# Altium PCB noura_jahani.PcbDoc
Units mm, origin at the board's own origin, x right, y up, seen from the top; angles counter-clockwise.
Board outline 101.35 x 63.02 mm, 2 copper layers (Top Layer, Bottom Layer); 28 components, 23 nets, 114 pads, 26 vias.
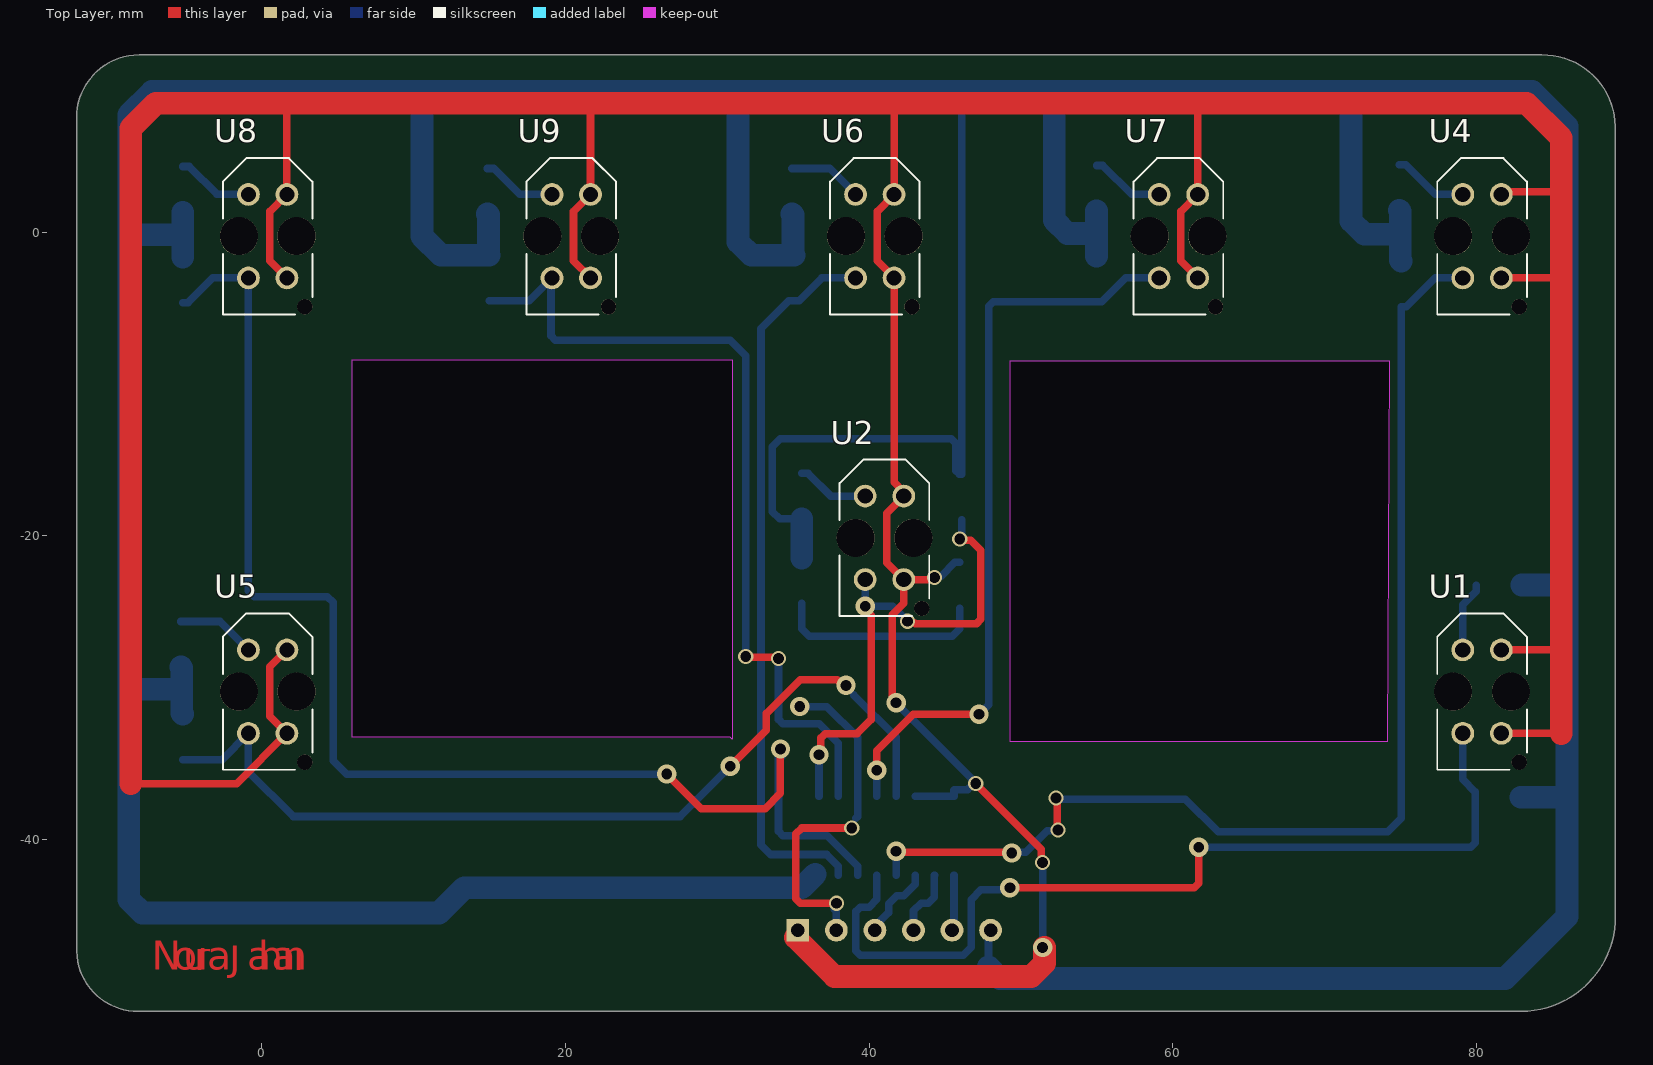
[diagram p0: Top Layer view]
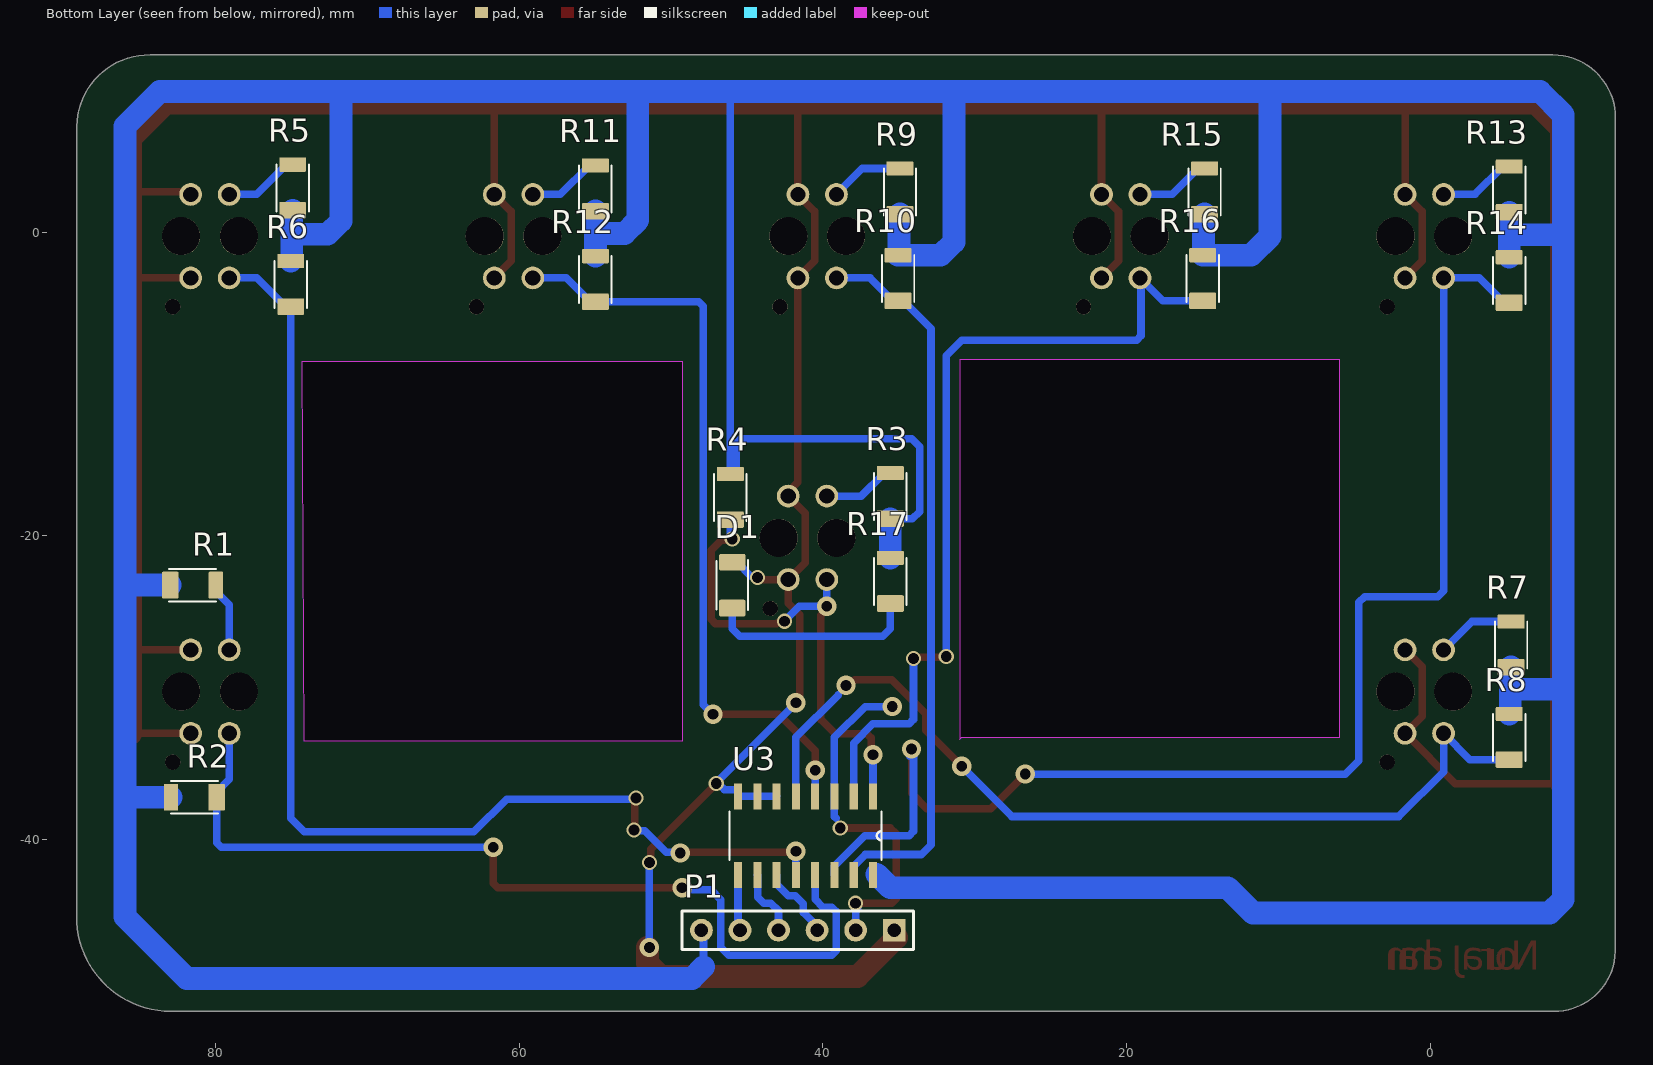
[diagram p1: Bottom Layer view, seen from below]
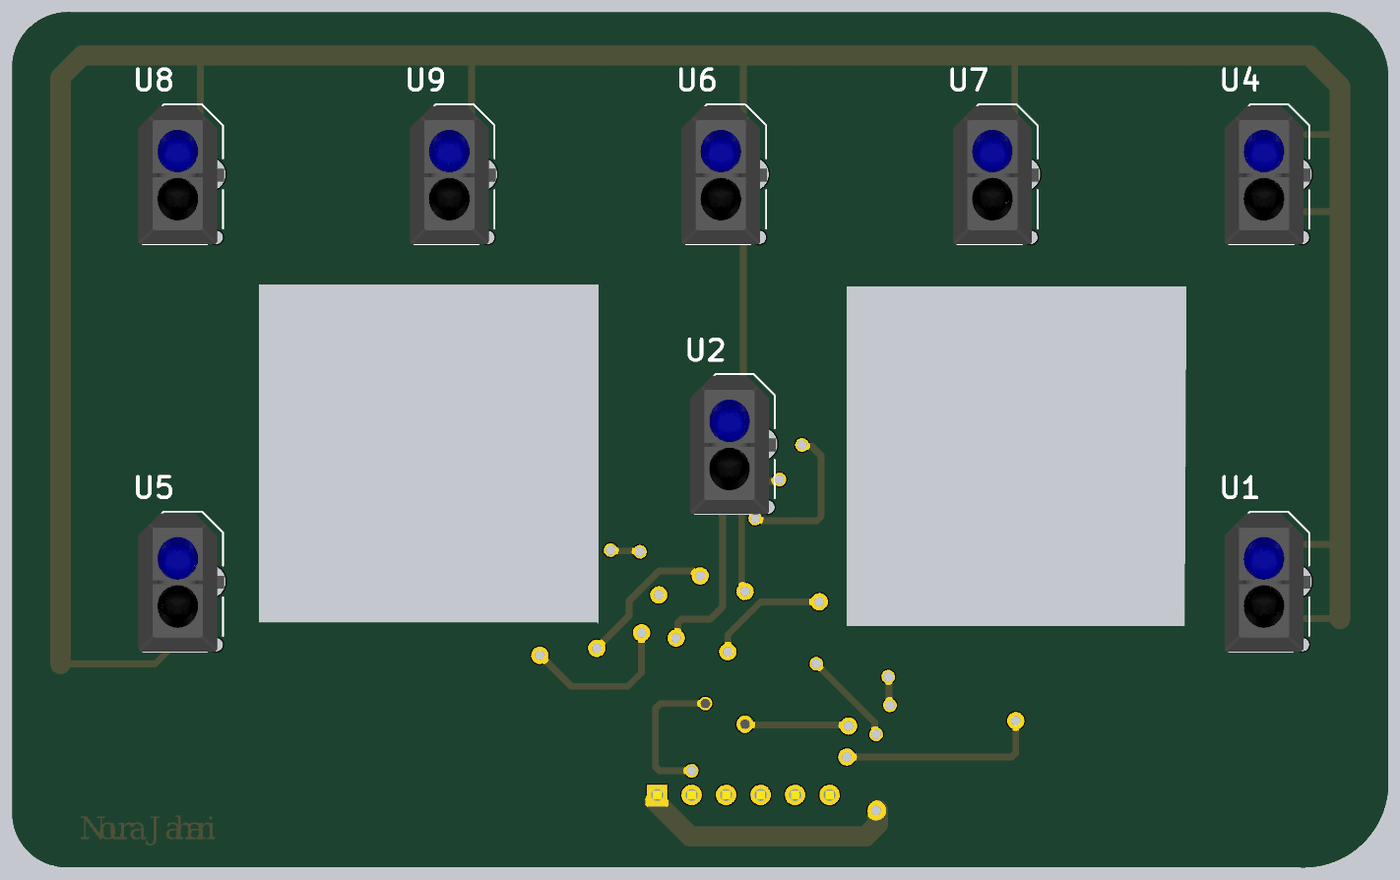
[diagram p2: 3D render of the assembled board from above, using the file's embedded part models]
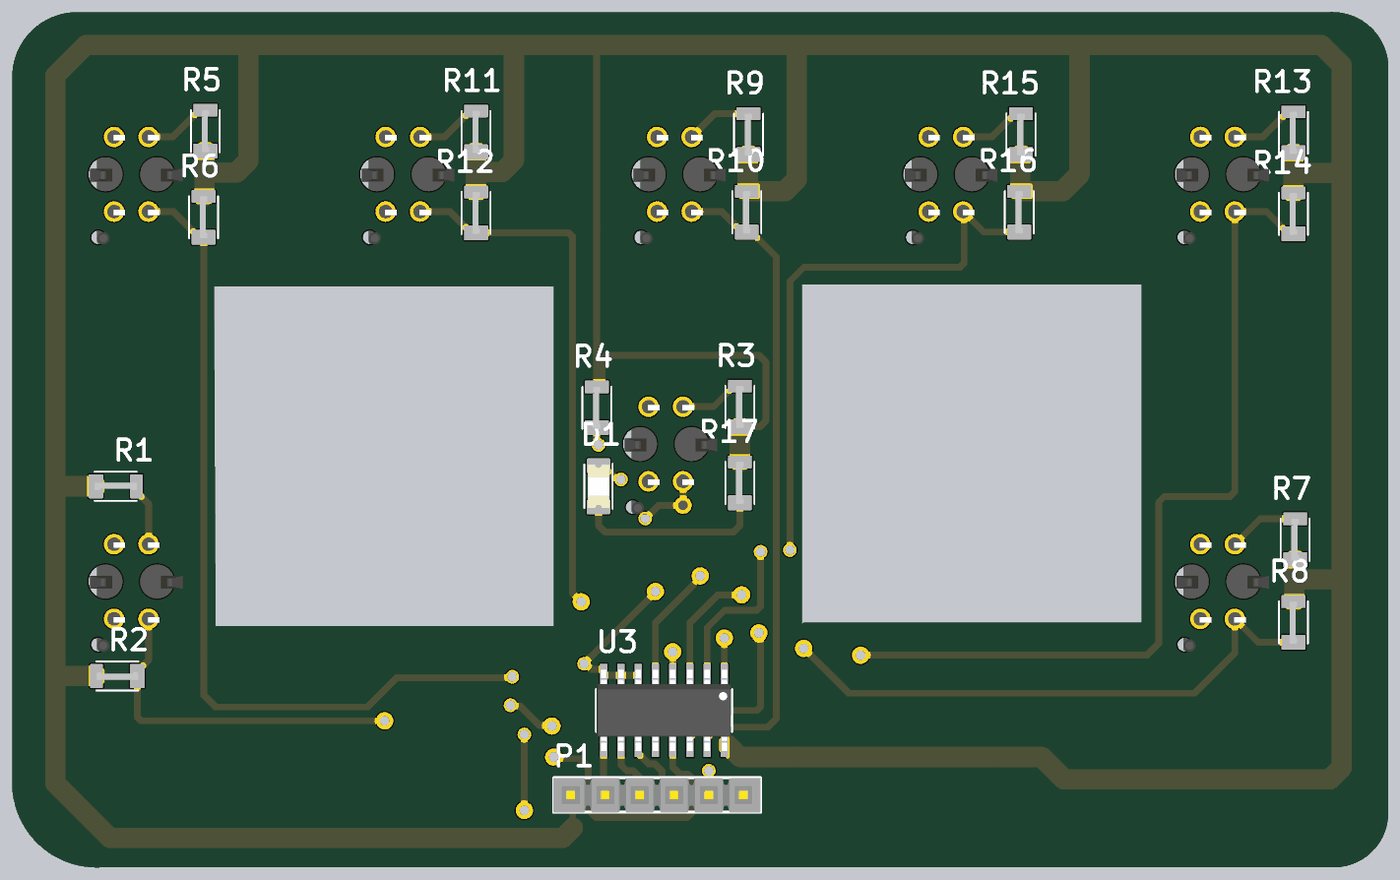
[diagram p3: 3D render of the assembled board from below, using the file's embedded part models]

## Layer stack, top to bottom
Top Solder: solder mask 0.0102, Solder Resist, Dk 3.5
Top Layer: signal copper 0.0356
Dielectric 1: dielectric 0.32, FR-4, Dk 4.8
Bottom Layer: signal copper 0.0356
Bottom Solder: solder mask 0.0102, Solder Resist, Dk 3.5

## Board outline
-12.192,-47.371 -12.192,7.874 cw(c-8.064,7.556) -7.747,11.684 84.328,11.684 cw(c84.391,6.921) 89.154,6.985 89.154,-45.466 cw(c82.931,-45.085) 82.55,-51.308 -8.128,-51.308 cw(c-8.192,-47.308)
cut-out: 5.969,-8.382 30.988,-8.382 30.988,-33.401 30.861,-33.274 5.969,-33.274
cut-out: 74.295,-8.509 49.276,-8.509 49.276,-33.528 74.168,-33.528

## Design rules (kind name [scope] priority, off if disabled: settings)
Clearance [All] p1: gap=0.254 ignorepadtopadclearanceinfootprint=FALSE except(0: Arc-Hole Track-Hole SMDPad-Hole THPad-Hole Via-Hole Fill-Hole Poly-Hole Region-Hole Text-Hole)
PolygonConnect [All] p1: connectstyle=Relief reliefconductorwidth=0.254 reliefentries=4 polygonreliefangle="90 Angle" airgapwidth=0.254
RoutingVias [All] p1: holewidth=0.711 width=1.27 viastyle="Through Hole" minholewidth=0.711 minwidth=1.27 maxholewidth=0.711 maxwidth=1.27
SolderMaskExpansion [All] p1: expansion=0.102 istentingtop=FALSE
Width [All] p1: maxlimit=2 minlimit=0.5 preferedwidth=1 minimp=50.000000 maximp=50.000000 favimp=50.000000
30 further rules are at their usual default settings.

## Components (designator, comment, footprint, x,y, rotation, side; value= is the part's Value field where it differs from the comment)
D1 "12" LEDC3216X110 45.974,-23.241 r90 bottom
P1 "Header 6" HDR1X6 35.306,-45.974 r0 bottom
R1 "1" RESC3115X65N 81.534,-23.241 r180 bottom
R2 "2" RESC3115X65N 81.407,-37.211 r0 bottom
R3 "9" RESC3115X65N 35.56,-17.399 r90 bottom
R4 "10" RESC3115X65N 46.101,-17.458 r90 bottom
R5 "3" RESC3115X65N 74.93,2.921 r90 bottom
R6 "4" RESC3115X65N 75.057,-3.429 r90 bottom
R7 "11" RESC3115X65N -5.334,-27.178 r90 bottom
R8 "12" RESC3115X65N -5.207,-33.274 r90 bottom
R9 "5" RESC3115X65N 34.925,2.667 r90 bottom
R10 "6" RESC3115X65N 35.052,-3.048 r90 bottom
R11 "13" RESC3115X65N 54.991,2.862 r90 bottom
R12 "14" RESC3115X65N 54.991,-3.107 r90 bottom
R13 "7" RESC3115X65N -5.207,2.794 r90 bottom
R14 "8" RESC3115X65N -5.207,-3.175 r90 bottom
R15 "15" RESC3115X65N 14.859,2.667 r90 bottom
R16 "16" RESC3115X65N 14.986,-3.048 r90 bottom
R17 "13" RESC3115X65N 35.56,-22.987 r90 bottom
U1 "TCRT5000" OPTO_TCRT5000 80.381,-30.254 r90 top
U2 "TCRT5000" OPTO_TCRT5000 41.016,-20.127 r90 top
U3 "74HC4051D" SOIC127P600X175-16N 41.148,-39.751 r270 bottom
U4 "TCRT5000" OPTO_TCRT5000 80.381,-0.254 r90 top
U5 "TCRT5000" OPTO_TCRT5000 0.381,-30.254 r90 top
U6 "TCRT5000" OPTO_TCRT5000 40.381,-0.254 r90 top
U7 "TCRT5000" OPTO_TCRT5000 60.381,-0.254 r90 top
U8 "TCRT5000" OPTO_TCRT5000 0.381,-0.254 r90 top
U9 "TCRT5000" OPTO_TCRT5000 20.381,-0.254 r90 top

## Footprints (in the part's own frame and the unit in brackets; to place one, negate y for a bottom-side part, rotate by r counter-clockwise, add the part's x,y. Pads: shape width x height; smd on the part's side, far side on the other; paste and mask are expansions set on the pad)
HDR1X6 [mm] "Connector; Header; 6 Position"
  rect 1.5x1.5 hole 0.9: 1(0,0)
  round 1.5 hole 0.9: 2(2.54,0) 3(5.08,0) 4(7.62,0) 5(10.16,0) 6(12.7,0)
  silkscreen extent -1.27,-1.27 13.97,1.27, body extent -1.26,-1.25 13.98,1.29, height 8.38
LEDC3216X110 [mm]
  rrect20% 1.1x1.73 smd: A(1.51,0) C(-1.51,0)
  silkscreen extent -1.65,-1.04 1.65,1.04, body extent -1.6,-0.8 1.6,0.8, height 1.1
OPTO_TCRT5000 [mm]
  round 1.5 hole 1: A(2.75,1.27) CATH(2.75,-1.27) COLL(-2.75,1.27) E(-2.75,-1.27)
  round 1 hole 1 unplated: ""(-4.65,-2.45)
  round 2.5 hole 2.5 unplated: ""(0,1.9) ""(0,-1.9)
  silkscreen extent -5.15,-2.95 5.15,2.95, body extent -5.16,-3.02 5.04,3.78, height 7.2
RESC3115X65N [mm]
  rrect14% 1.09x1.77 smd: 1(-1.465,0)
  rrect14% 0.94x1.77 smd: 2(1.54,0)
  silkscreen extent -1.55,-1.06 1.55,1.06, body extent -1.55,-0.28 1.55,0.28, height 1.54
SOIC127P600X175-16N [mil]
  rect 67x21 smd: 1(-102,175) 2(-102,125) 3(-102,75) 4(-102,25) 5(-102,-25) 6(-102,-75) 7(-102,-125) 8(-102,-175) 9(102,-175) 10(102,-125) 11(102,-75) 12(102,-25) 13(102,25) 14(102,75) 15(102,125) 16(102,175)
  silkscreen extent -62,-197 62,197, body extent -118,-195 118,195, height 69

## Part data
D1: library part LTST-C21KGKT, "Green 572nm LED Indication - Discrete 2.1V 1206 (3216 Metric)", Package="1206 Lite-On", Availability=Good, Check_prices=https://www.snapeda.com/parts/LTST-C21KGKT/Lite-On%20Inc./view-part/272494/?ref=eda, MF="Lite-On Inc.", MP=LTST-C21KGKT, Price=None, Purchase-URL=https://pricing.snapeda.com/search/part/LTST-C21KGKT/?ref=eda, SnapEDA_Link=https://www.snapeda.com/parts/LTST-C21KGKT/Lite-On%20Inc./view-part/272494/?ref=snap
P1: "Header, 6-Pin", LatestRevisionDate=17-Jul-2002, LatestRevisionNote="Re-released for DXP Platform.", Publisher="Altium Limited"
R1 R2 R3 R4 R5 R6 R7 R8 R9 R10 R11 R12 R13 R14 R15 R16 R17: library part 4-1879462-2, "RES 0.82 OHM 1% 1/4W 1206", Package=1206, Power_Rating=".25 W", Resistance=82, Tolerance=1%, Availability="In Stock", Check_prices=https://www.snapeda.com/parts/4-1879462-2/TE+Connectivity/view-part/?ref=eda, EU_RoHS_Compliance="Compliant with Exemptions", MF="TE Connectivity", MP=4-1879462-2, Price=None, SnapEDA_Link=https://www.snapeda.com/parts/4-1879462-2/TE+Connectivity/view-part/?ref=snap
U1 U2 U4 U5 U6 U7 U8 U9: "950 nm 60 mA Through Hole Reflective Optical Sensor with Transistor Output", Package=None, Availability=Unavailable, MP=TCRT5000, Price=None
U3: "1 Circuit IC Switch 8:1 130Ohm 16-SOIC", Package="SOIC-16 Toshiba", Availability="In Stock", Check_prices=https://www.snapeda.com/parts/74HC4051D/Toshiba/view-part/?ref=eda, MF=Toshiba, MP=74HC4051D, Price=None, Purchase-URL=https://pricing.snapeda.com/search/part/74HC4051D/?ref=eda, SnapEDA_Link=https://www.snapeda.com/parts/74HC4051D/Toshiba/view-part/?ref=snap

## Via types
v1: diameter 1.27, hole 0.711, Top Layer to Bottom Layer, 15 vias
v2: diameter 1, hole 0.711, Top Layer to Bottom Layer, 11 vias

## Nets (pads, with @x,y where several pads share a name; then routed paths per layer and width w, separated by ;. In a path a pad name is that pad's centre, name@x,y a point inside that pad or via, vN(x,y) a via of type N, cw(c..) or ccw(c..) an arc to the next point about the centre after c; other vN are vias at no path point)
+5: P1.6 R1.1 R2.2 R3.1 R4.2 R5.1 R6.2 R7.1 R8.2 R9.1 R10.2 R11.1 R12.2 R13.1 R14.2 R15.1 R16.2 R17.2 U3.16 | length 422
  Bottom Layer w0.5: R3.1 34.104,-18.864 33.635,-18.395 33.635,-14.117 34.163,-13.589 45.427,-13.589 45.72,-13.882 45.72,-15.698 45.94,-15.918 R4.2 46.101,9.271 46.101,9.398 ; 47.869,-48.387 47.869,-46.111 P1.6
  Bottom Layer w1.5: R7.1 -5.271,-28.707 -5.271,-30.188 ; R8.2 -5.271,-31.671 -5.271,-30.188 ; R14.2 -5.207,-0.153 ; R13.1 -5.207,-0.153 ; R15.1 14.922,1.138 14.922,-1.445 R16.2 11.795,-1.508 10.541,-0.254 10.541,9.271 ; R9.1 34.989,1.138 34.989,-1.445 R10.2 32.248,-1.508 31.369,-0.629 31.369,9.144 31.242,9.271 ; R17.2 R3.1 ; U3.16@36.449,-42.291 35.56,-43.18 13.329,-43.18 11.678,-44.831 -7.884,-44.831 -8.763,-43.952 -8.763,-30.099 ; 47.869,-48.387 48.631,-49.149 81.915,-49.149 85.979,-45.085 85.979,-37.592 ; R12.2 54.991,-0.085 ; R11.1 54.991,-0.085 ; R5.1 74.993,1.392 74.993,-0.216 ; R6.2 74.993,-1.826 74.993,-0.216 ; R2.2 85.598,-37.211 85.979,-37.592 ; R1.1 85.725,-23.241 85.979,-23.495 ; -8.763,-30.099 -8.763,-0.381 ; -8.763,-30.099 -5.36,-30.099 -5.271,-30.188 ; -8.763,-0.381 -8.763,7.747 -7.239,9.271 10.541,9.271 ; -8.763,-0.381 -8.535,-0.153 -5.207,-0.153 ; 10.541,9.271 31.242,9.271 ; 31.242,9.271 46.101,9.271 52.197,9.271 ; 52.197,9.271 71.755,9.271 ; 52.197,9.271 52.197,0.794 53.076,-0.085 54.991,-0.085 ; 71.755,9.271 83.693,9.271 85.979,6.985 85.979,-23.495 ; 71.755,9.271 71.755,0.752 72.634,-0.127 74.904,-0.127 74.993,-0.216 ; 85.979,-37.592 85.979,-23.495
GND: D1.A P1.1 U1.CATH U1.E U2.CATH U2.E U3.6 U3.7 U3.8 U4.CATH U4.E U5.CATH U5.E U6.CATH U6.E U7.CATH U7.E U8.CATH U8.E U9.CATH U9.E | length 338.9
  Top Layer w0.5: -8.636,-36.322 -1.667,-36.322 U5.E 0.527,-31.88 0.527,-28.628 U5.CATH ; U8.E 0.527,-1.88 0.527,1.372 U8.CATH 1.651,8.509 ; U9.E 20.527,-1.88 20.527,1.372 U9.CATH 21.651,8.062 22.098,8.509 ; 41.275,8.509 41.651,8.133 U6.CATH 40.527,1.372 40.527,-1.88 U6.E 41.651,-16.471 42.286,-17.106 U2.CATH 41.162,-18.501 41.162,-21.753 U2.E ; v1@41.529,-30.526 41.529,-25.199 42.286,-24.442 U2.E ; v2(44.315,-22.741) 44.179,-22.877 U2.E ; v2(47.031,-36.314) 47.031,-36.334 51.339,-40.642 51.339,-41.421 v2(51.435,-41.517) ; 61.468,8.509 61.651,8.326 U7.CATH 60.527,1.372 60.527,-1.88 U7.E ; U1.E 85.582,-33.004 85.598,-33.02 ; U1.CATH 85.526,-27.504 85.598,-27.432 ; U4.E 85.3,-3.004 85.598,-3.302 ; U4.CATH 81.822,2.667 85.598,2.667
  Top Layer w1.5: -8.636,-36.322 -8.636,6.858 -6.985,8.509 1.651,8.509 22.098,8.509 41.275,8.509 61.468,8.509 83.312,8.509 85.598,6.223 85.598,2.667 85.598,-3.302 85.598,-27.432 85.598,-33.02 ; P1.1@35.155,-46.458 37.719,-49.022 50.683,-49.022 51.562,-48.143 v1@51.562,-47.117
  Bottom Layer w0.5: v1(41.783,-30.988) 41.783,-31.027 47.031,-36.275 v2(47.031,-36.314) 46.895,-36.314 46.484,-36.726 45.61,-36.726 45.593,-36.742 U3.8 U3.7 U3.6 ; v2@44.744,-22.646 45.659,-21.731 D1.A ; v1(51.435,-47.117) v2(51.435,-41.517)
NetD1_C: D1.C R17.1 | length 13.9
  Bottom Layer w0.5: R17.1 35.56,-26.123 36.056,-26.619 45.478,-26.619 45.974,-26.123 D1.C
NetR1_2: R1.2 U1.A | length 4.6
  Bottom Layer w0.5: U1.A 79.111,-24.539 79.994,-23.656 R1.2
NetR3_2: R3.2 U2.A | length 4.8
  Bottom Layer w0.5: R3.2 35.975,-15.859 37.493,-17.377 U2.A
NetR5_2: R5.2 U4.A | length 5
  Bottom Layer w0.5: R5.2 75.345,4.461 77.31,2.496 U4.A
NetR7_2: R7.2 U5.A | length 5.2
  Bottom Layer w0.5: R7.2 -2.755,-25.638 U5.A
NetR9_2: R9.2 U6.A | length 4.9
  Bottom Layer w0.5: R9.2 37.4,4.207 U6.A
NetR11_2: R11.2 U7.A | length 4.9
  Bottom Layer w0.5: R11.2 55.406,4.402 57.312,2.496 U7.A
NetR13_2: R13.2 U8.A | length 5.1
  Bottom Layer w0.5: R13.2 -4.792,4.334 -2.954,2.496 U8.A
NetR15_2: R15.2 U9.A | length 5
  Bottom Layer w0.5: R15.2 15.274,4.207 16.985,2.496 U9.A
S0: P1.3 U3.11 | length 5
  Bottom Layer w0.5: P1.3 40.386,-45.703 41.284,-44.805 41.284,-44.237 41.825,-43.697 42.282,-43.697 43.036,-42.943 43.036,-42.359 U3.11
S1: P1.4 U3.10 | length 4.5
  Bottom Layer w0.5: P1.4 42.926,-44.704 43.434,-44.196 43.903,-44.196 44.306,-43.793 44.306,-42.359 U3.10
S2: P1.5 U3.9 | length 3.7
  Bottom Layer w0.5: P1.5 45.593,-45.847 U3.9
Y0: R2.1 U1.COLL U3.13 | length 60.1
  Top Layer w0.5: v1(49.276,-43.18) 61.429,-43.18 61.722,-42.887 v1(61.722,-40.513)
  Bottom Layer w0.5: U3.13 40.513,-43.942 40.005,-44.45 39.409,-44.45 39.116,-44.743 39.116,-47.332 39.409,-47.625 46.189,-47.625 46.72,-47.094 46.72,-43.958 47.371,-43.307 v1@48.895,-43.307 ; v1@61.918,-40.513 79.649,-40.513 79.942,-40.22 R2.1 79.942,-36.871 79.111,-36.04 U1.COLL
Y1: R6.1 U3.12 U4.COLL | length 77.7
  Top Layer w0.5: v1(41.783,-40.767) 41.846,-40.831 49.34,-40.831 v1(49.403,-40.894) ; v2(52.324,-37.269) 52.387,-37.333 52.387,-39.306 v2(52.451,-39.37)
  Bottom Layer w0.5: U3.12 v1(41.783,-40.767) ; v1(49.403,-40.894) 49.448,-40.849 50.317,-40.849 51.739,-39.426 52.395,-39.426 v2(52.451,-39.37) ; v2(52.324,-37.269) 52.393,-37.338 60.833,-37.338 62.992,-39.497 74.168,-39.497 75.057,-38.608 R6.1 75.397,-4.894 77.287,-3.004 U4.COLL
Y2: R10.1 U3.15 U6.COLL | length 47.9
  Bottom Layer w0.5: U3.15 37.973,-41.758 37.202,-40.987 33.521,-40.987 32.881,-40.347 32.881,-6.344 34.712,-4.513 R10.1 35.392,-4.513 36.901,-3.004 U6.COLL
Y3: R14.1 U3.14 U8.COLL | length 88.3
  Top Layer w0.5: v1(26.67,-35.687) 28.956,-37.973 33.147,-37.973 34.163,-36.957 v1(34.163,-34.036)
  Bottom Layer w0.5: R14.1 -4.867,-4.64 -3.231,-3.004 U8.COLL -0.889,-23.622 -0.508,-24.003 4.318,-24.003 4.699,-24.384 4.699,-34.798 5.588,-35.687 v1(26.67,-35.687) ; v1(34.163,-34.036) 34.036,-34.163 34.036,-39.458 34.329,-39.751 37.236,-39.751 39.243,-41.758 U3.14 ; v1@34.29,-34.495 v1@34.29,-34.417
Y4: R4.1 U2.COLL U3.1 | length 32.6
  Top Layer w0.5: v1(36.703,-34.417) 36.83,-34.29 36.83,-33.313 37.123,-33.02 39.204,-33.02 40.132,-32.092 40.132,-25.227 39.751,-24.846 v1(39.751,-24.638) ; v2(42.533,-25.615) 42.629,-25.711 42.98,-25.711 43.05,-25.781 47.078,-25.781 47.371,-25.488 47.371,-20.955 46.705,-20.289 46.07,-20.289 v2(45.974,-20.193)
  Bottom Layer w0.5: U3.1 v1(36.703,-34.417) ; v1@39.746,-24.379 U2.COLL ; v1(39.751,-24.638) 41.556,-24.638 v2(42.533,-25.615) ; v2(45.974,-20.193) 46.101,-20.066 R4.1
Y5: R8.1 U3.5 U5.COLL | length 60.2
  Top Layer w0.5: v1(30.861,-35.179) 33.239,-32.801 33.239,-31.698 35.469,-29.468 37.896,-29.468 38.273,-29.845 v1(38.481,-29.845)
  Bottom Layer w0.5: R8.1 -2.624,-34.739 U5.COLL -0.889,-35.521 2.071,-38.481 27.559,-38.481 v1@30.607,-35.433 ; 38.989,-30.48 41.783,-33.274 U3.5
Y6: R12.1 U3.4 U7.COLL | length 49.7
  Top Layer w0.5: v1(40.513,-35.433) 40.513,-34.163 42.926,-31.75 v1(47.244,-31.75)
  Bottom Layer w0.5: U3.4 v1(40.513,-35.433) ; v1@47.371,-31.623 47.879,-31.115 47.879,-4.865 48.172,-4.572 R12.1 55.331,-4.572 56.899,-3.004 U7.COLL
Y7: R16.1 U3.2 U9.COLL | length 55.5
  Top Layer w0.5: v2(31.877,-27.94) 31.941,-28.003 33.972,-28.003 v2(34.036,-28.067)
  Bottom Layer w0.5: R16.1 17.602,-4.513 U9.COLL@19.05,-3.065 ; U9.COLL U9.COLL@19.05,-3.065 ; 31.877,-27.432 31.877,-8.128 30.861,-7.112 19.343,-7.112 19.05,-6.819 U9.COLL@19.05,-3.065 ; v2(34.036,-28.067) 34.036,-32.092 34.329,-32.385 36.703,-32.385 37.973,-33.655 U3.2
Z: P1.2 U3.3 | length 22.4
  Top Layer w0.5: v2(37.846,-44.196) 35.472,-44.196 35.179,-43.903 35.179,-39.624 35.56,-39.243 v2(38.862,-39.243)
  Bottom Layer w0.5: v1(35.433,-31.242) 37.211,-31.242 39.243,-33.274 U3.3 39.243,-38.481 39.116,-38.608 ; v2@37.719,-44.577 37.846,-44.704 P1.2
pads on no net: U1. U2. U4. U5. U6. U7. U8. U9.

## Other copper
Top Layer:
  text "N" at -7.241,-49.218 h3.24
  text "o" at -5.843,-49.218 h3.24
  text "u" at -5.166,-49.218 h3.24
  text "r" at -4.446,-49.218 h3.24
  text "a" at -3.599,-49.218 h3.24
  text "J" at -2.159,-49.218 h3.24
  text "a" at -0.974,-49.218 h3.24
  text "h" at -0.254,-49.218 h3.24
  text "a" at 0.635,-49.218 h3.24
  text "n" at 1.355,-49.218 h3.24
  text "i" at 2.075,-49.218 h3.24

## Silkscreen, mask and mechanical layers (free items; w line width, h text height)
Mechanical 1:
  lines w0.254: 81.407,40.606 cw(c84.619,40.716) 84.899,43.917 ; -12.192,-47.371 ccw(c-8.191,-47.307) -8.128,-51.308 82.55,-51.308 ccw(c82.931,-45.085) 89.154,-45.466 89.154,6.985 ccw(c84.391,6.921) 84.328,11.684 -7.747,11.684 ccw(c-8.064,7.556) -12.192,7.874 -12.192,-44.45 -12.192,-47.371 ; 5.607,-33.128 30.607,-33.128 30.607,-8.128 5.607,-8.128 5.607,-33.128 ; 48.895,-33.255 73.895,-33.255 73.895,-8.255 48.895,-8.255 48.895,-33.255